# EAGLE board ares2015_motor_v0 (EAGLE 6.5.0)
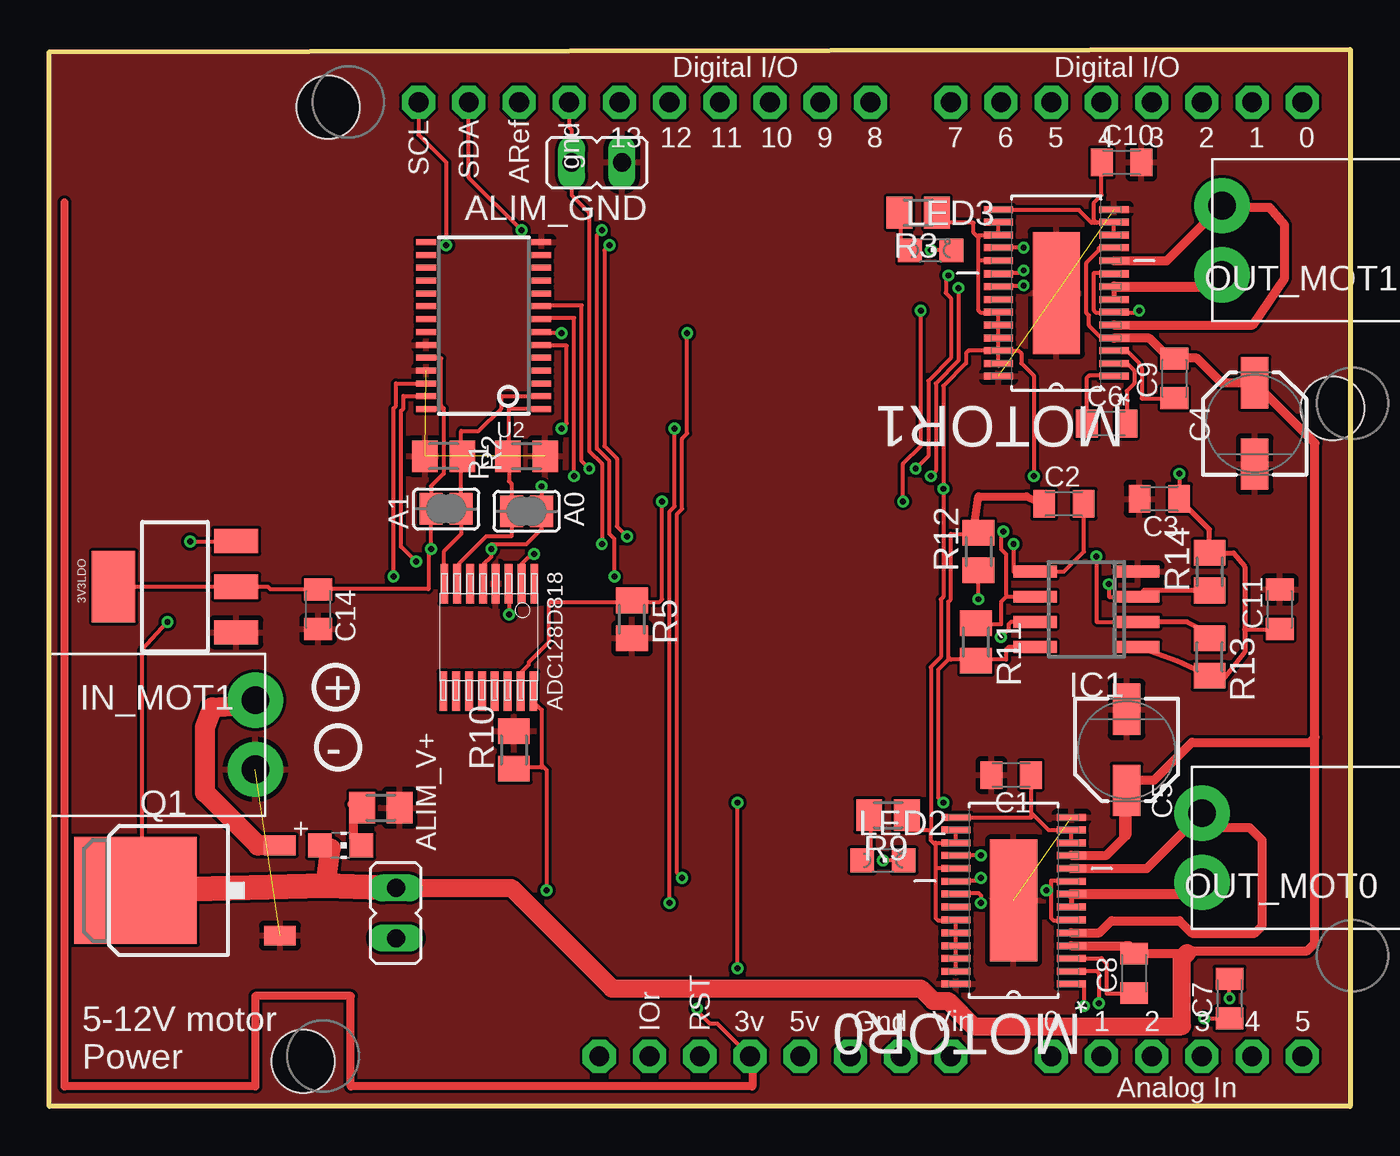
[diagram p0: board, top side]
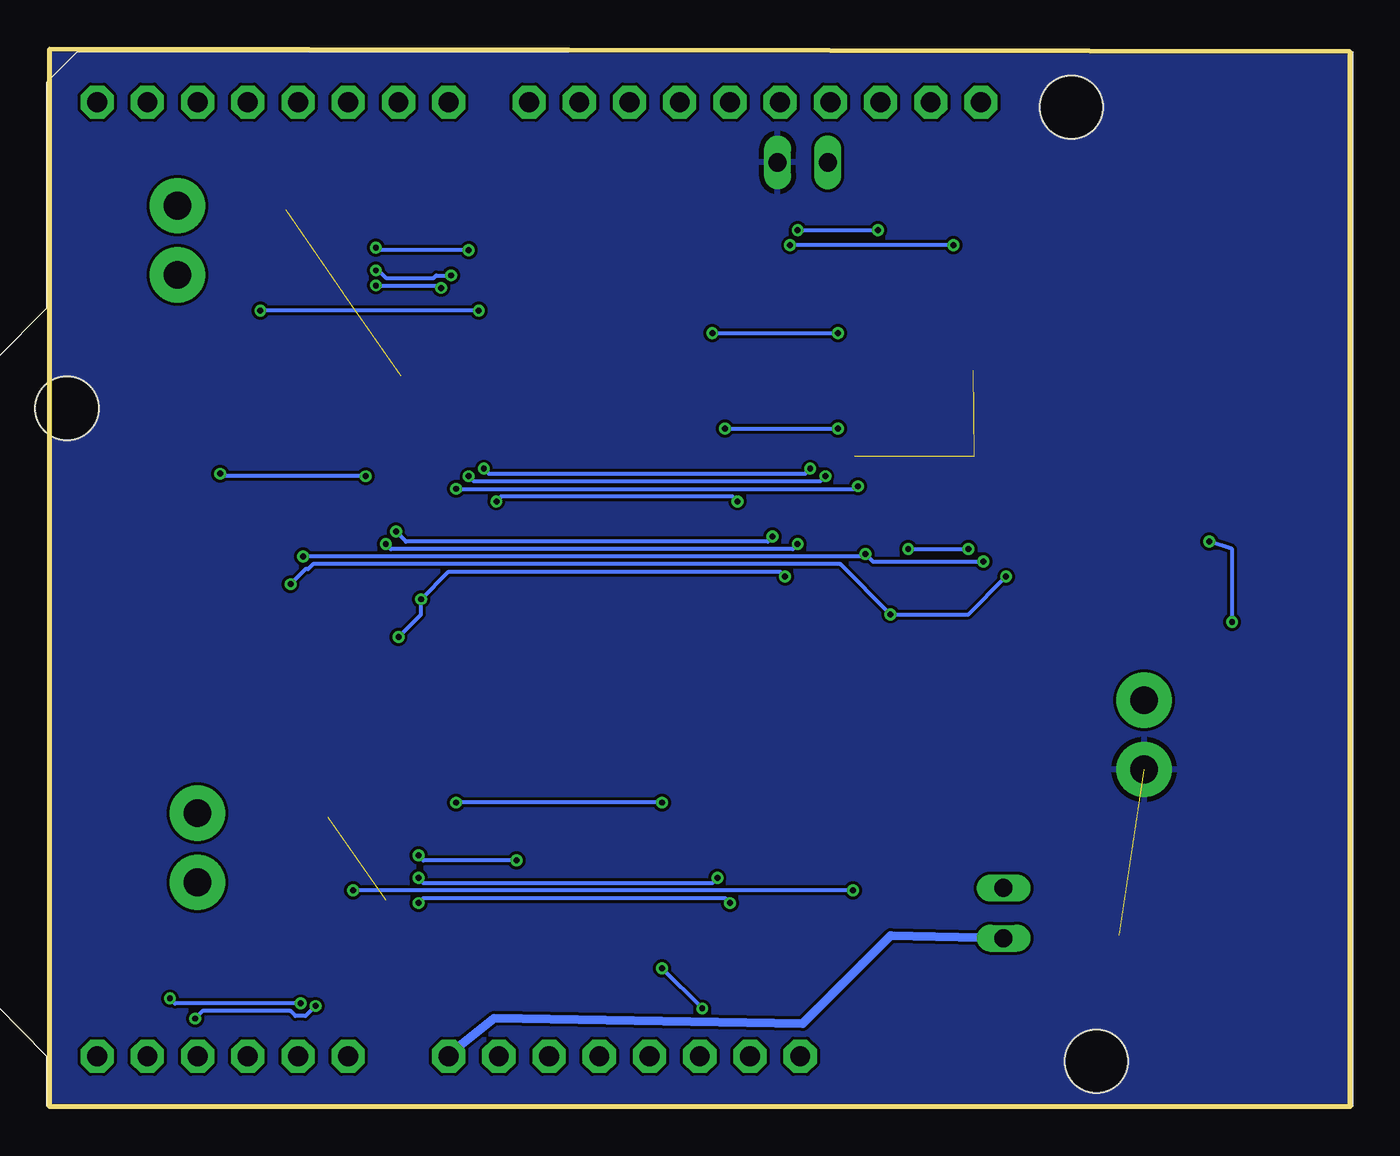
[diagram p1: board, bottom side, seen from below]

Size 65.79 x 53.47 mm. Coordinates in mm from the lower left corner, seen from the top.
Outline: 0,53.34 65.79,53.47 65.79,0 0,0 0,53.34
Copper layers (1*16): Top 0.035mm / dielectric 1.6mm / Bottom 0.035mm
Design rules "dipole": minimum track width 0.2mm, minimum drill 0.3mm, track to track 0.15mm, track to pad 0.15mm, pad to pad 0.15mm, via to via 0.15mm, smd to smd 0.01mm, copper to edge 0.01mm, drill to drill 0.01mm, minimum pad ring 0.15mm, minimum via ring 0.15mm, stop-mask expansion 1mil, vias tented up to drill 0mil, thermal gap 10mil
Holes 3.2 mm at 14.1,50.55 64.9,35.31 12.83,2.29

## Footprints (pad centres in the part's own frame; a part is rotated, then mirrored left to right if it is on the bottom)
SOT223 = smd 1.219 x 2.235: 1 -2.311,-3.099; 2 0,-3.099; 3 2.311,-3.099 | smd 3.6 x 2.2: 4 0,3.099
SJ = smd 1.168 x 1.6: 1 -0.762,0; 2 0.762,0
JP1 = drill 0.914 long: 1 0,-1.27; 2 0,1.27
C0805K = smd 1.1 x 1.4: 1 -1,0; 2 1,0
PANASONIC_C = smd 2.6 x 1.4: + 2.05,0; - -2.05,0
SO-08 = smd 0.6 x 2.2: 1 -1.905,-2.6; 2 -0.635,-2.6; 3 0.635,-2.6; 4 1.905,-2.6; 5 1.905,2.6; 6 0.635,2.6; 7 -0.635,2.6; 8 -1.905,2.6
SL-3.5-2-90G = drill 1.4 pad 2.8: 1 0,-1.75; 2 0,1.75
CHIP-LED0805 = smd 1.2 x 1.2: A 0,-1.05; C 0,1.05
CHIPLED_0805 = smd 1.2 x 1.2: A 0,-1.05; C 0,1.05
SOP65P640X120-29N = smd 1.473 x 0.356: 1 -2.921,4.216; 2 -2.921,3.581; 3 -2.921,2.921; 4 -2.921,2.286; 5 -2.921,1.626; 6 -2.921,0.965; 7 -2.921,0.33; 8 -2.921,-0.33; 9 -2.921,-0.965; 10 -2.921,-1.626; 11 -2.921,-2.286; 12 -2.921,-2.921; 13 -2.921,-3.581; 14 -2.921,-4.216; 15 2.921,-4.216; 16 2.921,-3.581; 17 2.921,-2.921; 18 2.921,-2.286; 19 2.921,-1.626; 20 2.921,-0.965; 21 2.921,-0.33; 22 2.921,0.33; 23 2.921,0.965; 24 2.921,1.626; 25 2.921,2.286; 26 2.921,2.921; 27 2.921,3.581; 28 2.921,4.216 | smd 2.388 x 6.172: 29 0,0
D-PAK_TO252AA = smd 1 x 1.6: 1 -2.28,-4.8; 3 2.28,-4.8 | smd 5.4 x 6.2: 4 0,2.5
M0805 = smd 1.3 x 1.6: 1 -0.95,0; 2 0.95,0
ARDUINOR3-BPLACE = drill 1 pad 1.676 octagon: 3V 35.56,2.54; 5V 38.1,2.54; A0 50.8,2.54; A1 53.34,2.54; A2 55.88,2.54; A3 58.42,2.54; A4 60.96,2.54; A5 63.5,2.54; AREF 23.876,50.8; D0 63.5,50.8; D1 60.96,50.8; D2 58.42,50.8; D3 55.88,50.8; D4 53.34,50.8; D5 50.8,50.8; D6 48.26,50.8; D7 45.72,50.8; D8 41.656,50.8; D9 39.116,50.8; D10 36.576,50.8; D11 34.036,50.8; D12 31.496,50.8; D13 28.956,50.8; GND 26.416,50.8; GND1 43.18,2.54; GND2 40.64,2.54; IOREF 30.48,2.54; RESERVED 27.94,2.54; RESET 33.02,2.54; SCL 18.796,50.8; SDA 21.336,50.8; VIN 45.72,2.54
TSSOP28 = smd 0.305 x 0.991: 1 -4.225,-2.918; 2 -3.575,-2.918; 3 -2.925,-2.918; 4 -2.275,-2.918; 5 -1.625,-2.918; 6 -0.975,-2.918; 7 -0.325,-2.918; 8 0.325,-2.918; 9 0.975,-2.918; 10 1.625,-2.918; 11 2.275,-2.918; 12 2.925,-2.918; 13 3.575,-2.918; 14 4.225,-2.918; 15 4.225,2.918; 16 3.575,2.918; 17 2.925,2.918; 18 2.275,2.918; 19 1.625,2.918; 20 0.975,2.918; 21 0.325,2.918; 22 -0.325,2.918; 23 -0.975,2.918; 24 -1.625,2.918; 25 -2.275,2.918; 26 -2.925,2.918; 27 -3.575,2.918; 28 -4.225,2.918
ADC128D818 = smd 0.4 x 2: 1 -2.3,-2.7; 2 -1.65,-2.7; 3 -1,-2.7; 4 -0.35,-2.7; 5 0.3,-2.7; 6 0.95,-2.7; 7 1.6,-2.7; 8 2.25,-2.7; 9 2.3,2.75; 10 1.65,2.75; 11 1,2.75; 12 0.35,2.75; 13 -0.3,2.75; 14 -0.95,2.75; 15 -1.6,2.75; 16 -2.25,2.75

## Placement (x,y rotation side)
3V3LDO  [SOT223]  6.35,26.29 90 top
A0  [SJ]  24.13,30.1 180 top
A1  [SJ]  20.07,30.23 0 top
ALIM_GND  [JP1]  27.69,47.75 90 top
ALIM_V+  [JP1]  17.53,9.78 180 top
C1  0.47uF  [C0805K]  48.64,16.76 180 top
C2  0.1uF  [C0805K]  51.31,30.48 0 top
C3  0.1uF  [C0805K]  56.13,30.73 180 top
C4  22uF/16v  [PANASONIC_C]  60.96,34.54 90 top
C5  22uF/16v  [PANASONIC_C]  54.48,18.03 270 top
C6  0.01uF  [C0805K]  53.47,34.54 0 top
C7  0.01uF  [C0805K]  59.69,5.46 90 top
C8  0.1uF  [C0805K]  54.86,6.73 90 top
C9  0.1uF  [C0805K]  56.9,36.83 90 top
C10  0.47uF  [C0805K]  54.23,47.75 0 top
C11  0.1uF  [C0805K]  62.23,25.15 90 top
C14  0.1uF  [C0805K]  13.59,25.15 270 top
IC1  ISO1541  [SO-08]  52.45,25.15 90 top
IN_MOT1  SL-3.5-2-90G  [SL-3.5-2-90G]  10.41,18.8 0 top
LED1  Green  [CHIP-LED0805]  14.73,13.21 270 top
LED2  rouge  [CHIPLED_0805]  42.16,12.45 270 top
LED3  rouge  [CHIPLED_0805]  44.58,43.31 270 top
MOTOR0  DRV8828PWP  [SOP65P640X120-29N]  48.77,10.41 180 top
MOTOR1  DRV8828PWP  [SOP65P640X120-29N]  50.93,41.15 180 top
OUT_MOT0  SL-3.5-2-90G  [SL-3.5-2-90G]  58.29,13.08 180 top
OUT_MOT1  SL-3.5-2-90G  [SL-3.5-2-90G]  59.31,43.82 180 top
Q1  AOD417  [D-PAK_TO252AA]  6.86,10.92 90 top
R1  10k  [M0805]  24.13,32.89 180 top
R2  10k  [M0805]  19.94,32.89 0 top
R3  330  [M0805]  43.94,45.21 180 top
R4  1K  [M0805]  16.76,15.11 180 top
R5  0.25  [M0805]  29.46,24.64 270 top
R9  330  [M0805]  42.42,14.73 180 top
R10  0.25  [M0805]  23.5,18.03 90 top
R11  1.5k  [M0805]  46.86,23.49 270 top
R12  1.5k  [M0805]  46.99,28.07 90 top
R13  1.5k  [M0805]  58.67,22.73 270 top
R14  1.5k  [M0805]  58.67,27.05 90 top
U1  ARDUINOR3-BPLACE  [ARDUINOR3-BPLACE]  -0.13,0 0 top
U2  PCA9685  [TSSOP28]  21.97,39.5 90 top
U$6  LMD128D818  [ADC128D818]  22.22,23.75 180 top

## Library data of the parts
3V3LDO = SparkFun-PowerIC; MF: NXP; MPN: ACT108W-600D; OC_FARNELL: 2074968
A0 A1 ALIM_GND ALIM_V+ = jumper; OC_FARNELL: unknown
C1 C10 = adafruit; MF: AVX; MPN: 04026D474KAT2A; OC_FARNELL: 1740587
C2 C3 C8 C9 C11 C14 = adafruit; MF: AVX; MPN: 02016D104KAT2A; OC_FARNELL: 1657913
C4 C5 U2 = microbuilder; OC_FARNELL: unknown
C6 C7 = adafruit; MF: AVX; MPN: 0201ZC103KAT2A; OC_FARNELL: 2280757
IC1 = texas; MF: TEXAS INSTRUMENTS; MPN: ISO7220AD; OC_FARNELL: 1390649; OC_NEWARK: 48M0666
IN_MOT1 OUT_MOT0 OUT_MOT1 = WEIDMULLER; MF: WEIDMULLER; MPN: SL 3.5/2/90G; OC_FARNELL: 1121786
LED1-LED3 R1-R5 R9-R14 = adafruit; OC_FARNELL: unknown
MOTOR0 MOTOR1 = Texas Instruments_By_element14_Batch_1; MPN: DRV8828PWP; OC_FARNELL: unknown; OC_NEWARK: 79R7959; PACKAGE: TSSOP-28; SUPPLIER: Texas Instruments
Q1 = transistor-power; OC_FARNELL: unknown
U1 = adafruit
U$6 = ADS128D818; OC_FARNELL: unknown

## Nets
+12V: 3V3LDO.3 ALIM_V+.1 C4.+ C5.+ C8.2 C9.2 LED1.A MOTOR0.4 MOTOR0.11 MOTOR1.4 MOTOR1.11 Q1.4
/RST: U1.RESET
A0: A0.2 R1.2 U2.1 U$6.7
A1: A1.2 R2.2 U2.2 U$6.8
A2: U2.3
A3: U2.4
A4: U2.5
ADC0: MOTOR0.6 MOTOR0.9 R10.1 U$6.16
ADC1: MOTOR1.6 MOTOR1.9 R5.1 U$6.15
ADC2: U$6.14
ADC3: U$6.13
ADC4: U$6.12
ADC5: U$6.11
ADC6: U$6.10
ADC7: U$6.9
GND: 3V3LDO.1 ALIM_GND.1 C1.2 C3.2 C4.- C5.- C10.2 C11.2 C14.2 IC1.4 IN_MOT1.1 MOTOR0.14 MOTOR0.28 MOTOR0.29 MOTOR1.14 MOTOR1.28 MOTOR1.29 Q1.1 R1.1 R2.1 R4.1 R5.2 R10.2 U2.14 U2.23 U2.25 U$6.4
GND1: U1.GND1
GND2: U1.GND2
GND_CLEAN: ALIM_GND.2 C2.2 IC1.5 U1.GND
N$1: U1.IOREF
N$2: U1.RESERVED
N$4: U1.D9
N$6: C6.1 MOTOR1.1
N$7: MOTOR0.7 MOTOR0.8 OUT_MOT0.2
N$9: U1.5V
N$12: C6.2 MOTOR1.2
N$14: C9.1 MOTOR1.3
N$15: U1.A5
N$16: MOTOR0.5 MOTOR0.10 OUT_MOT0.1
N$17: U1.A4
N$18: LED3.C MOTOR1.18
N$19: LED3.A R3.2
N$20: U1.A0
N$21: U1.A1
N$22: U1.A2
N$23: U1.A3
N$24: U1.D0
N$25: U1.D1
N$26: U1.D2
N$27: U1.D4
N$28: U1.D7
N$29: U1.D8
N$30: U1.D12
N$31: U1.D13
N$32: U1.AREF
N$33: MOTOR1.5 MOTOR1.10 OUT_MOT1.1
N$35: MOTOR1.7 MOTOR1.8 OUT_MOT1.2
N$36: C7.1 MOTOR0.1
N$37: C7.2 MOTOR0.2
N$39: C8.1 MOTOR0.3
N$44: LED2.A R9.2
N$45: LED2.C MOTOR0.18
N$133: LED1.C R4.2
N$140: IN_MOT1.2 Q1.3
PWM0: MOTOR0.21 U2.6
PWM0A: U1.D6
PWM0B: U1.D5
PWM1: MOTOR0.20 U2.7
PWM1B: U1.D10
PWM2: MOTOR1.21 U2.8
PWM2A: U1.D11
PWM2B: U1.D3
PWM3: MOTOR1.20 U2.9
PWM4: U2.10
PWM5: U2.11
PWM6: U2.12
PWM7: U2.13
PWM8: U2.15
PWM9: U2.16
PWM10: U2.17
PWM11: U2.18
PWM12: U2.19
PWM13: U2.20
PWM14: U2.21
PWM15: U2.22
SCL: IC1.3 R14.1 U2.26 U$6.3
SCL_CLEAN: IC1.6 R11.1 U1.SCL
SDA: IC1.2 R13.1 U2.27 U$6.2
SDA_CLEAN: IC1.7 R12.1 U1.SDA
V3POUT0: C1.1 MOTOR0.12 MOTOR0.13 MOTOR0.15
V3POUT1: C10.1 MOTOR1.12 MOTOR1.13 MOTOR1.15
VCC: 3V3LDO.2 3V3LDO.4 A0.1 A1.1 C3.1 C11.1 C14.1 IC1.1 MOTOR0.16 MOTOR0.17 MOTOR0.19 MOTOR0.23 MOTOR0.24 MOTOR0.25 MOTOR0.26 MOTOR0.27 MOTOR1.16 MOTOR1.17 MOTOR1.19 MOTOR1.23 MOTOR1.24 MOTOR1.25 MOTOR1.26 MOTOR1.27 R3.1 R9.1 R13.2 R14.2 U2.24 U2.28 U$6.5
VCC_CLEAN: C2.1 IC1.8 R11.2 R12.2 U1.3V
VIN_ARDUINO: ALIM_V+.2 U1.VIN

## Tracks (layer width: path | path; a pad name or v marks a point on that pad's centre or on a via)
+12V  (via drill 0.3)
  Top 0.2: MOTOR1.11 53.09,43.43 53.09,43.31 52.45,42.67 52.45,40.13 52.58,40.01 52.58,39.5 53.21,38.86 MOTOR1.4 | v7.11,28.57 9.4,28.57 3V3LDO.3 | v5.97,24.51 4.7,23.11 4.7,11.56 7.11,11.56 Q1.4
  Top 0.457: C5.+ 54.48,13.72 54.36,13.59 | C8.2 54.47,8.13 MOTOR0.4 54.61,8.13 54.99,7.75 57.53,7.75 57.66,7.75 57.78,7.87 63.63,7.87 64.01,8.26 64.01,18.67 | 64.01,18.67 64.01,33.55 C4.+ 59.29,36.59 58.04,37.85 56.91,37.85 C9.2 56.66,37.83 55.63,38.86 MOTOR1.4 | MOTOR0.11 53.47,12.7 54.36,13.59 | 54.36,13.59 54.36,16 54.86,16.51 55.88,16.51 57.78,18.41 63.75,18.41 64.01,18.67
  Top 0.914: ALIM_V+.1 23.37,11.05 28.45,5.97 44.07,5.97 44.7,5.33 45.47,5.33 46.74,4.06 57.28,4.06 57.28,7.49 57.53,7.75
  Top 1.016: LED1.A 14.22,13.05 13.97,11.18
  Top 1.27: Q1.4 13.97,11.18 ALIM_V+.1
  Bottom 0.2: v7.11,28.57 5.97,28.19 v5.97,24.51
A0
  Top 0.2: 23.24,32.89 23.24,35.31 24.77,35.31 U2.1 | 23.24,32.89 23.24,31.62 23.37,31.5 A0.2 23.37,28.83 22.1,28.83 20.7,27.43 20.7,26.54 U$6.7 | 23.24,32.89 R1.2
A1
  Top 0.2: 20.83,32.89 A1.2 20.83,28.96 19.94,28.07 19.94,26.54 U$6.8 | 20.83,32.89 20.83,34.16 21.72,34.16 22.86,35.31 22.86,35.94 24.77,35.94 U2.2 | 20.83,32.89 R2.2
ADC0  (via drill 0.3)
  Top 0.2: 50.67,10.92 50.67,9.53 50.8,9.4 51.69,9.4 MOTOR0.6 | 50.67,10.92 50.67,11.43 51.69,11.43 MOTOR0.9 | 24.89,17.27 24.89,20.07 24.51,20.45 24.51,20.95 U$6.16 | 24.89,17.27 24.89,17.14 23.5,17.14 R10.1 | v50.42,10.92 50.67,10.92 | v25.15,10.92 25.15,17.02 24.89,17.27
  Bottom 0.2: v25.15,10.92 v50.42,10.92
ADC1  (via drill 0.3)
  Top 0.2: 53.85,40.13 52.96,40.13 52.83,40.26 52.83,42.16 53.85,42.16 MOTOR1.9 | 29.46,25.53 25.27,25.53 25.27,23.49 24.26,22.48 24.26,22.35 23.88,21.97 23.88,21.08 U$6.15 | 53.85,40.13 55.12,40.13 v55.12,40.26 | v44.07,40.26 44.07,33.4 43.18,32.51 v43.18,30.61 | v30.99,30.61 30.99,25.65 30.86,25.53 29.46,25.53 | 53.85,40.13 MOTOR1.6 | 29.46,25.53 R5.1
  Bottom 0.2: v44.07,40.26 v55.12,40.26 | v43.18,30.61 42.93,30.86 31.24,30.86 v30.99,30.61
GND  (6 unrouted)
  pour Bottom: -7.24,-9.14 -4.19,58.8 75.18,56.64 78.49,-7.37
  pour Top: -6.48,-4.45 -5.33,57.02 76.96,58.04 76.96,-4.57
GND_CLEAN  (via drill 0.3)
  Top 0.2: C2.2 52.32,30.48 52.32,28.07 51.31,27.05 IC1.5 48.77,27.05 v48.77,28.45 | U1.GND 26.29,49.53 26.42,49.4 ALIM_GND.2 26.42,46.1 27.3,45.21 27.3,33.15 27.94,32.51 v27.94,28.45
  Bottom 0.2: v48.77,28.45 48.51,28.19 28.19,28.19 v27.94,28.45
N$6
  Top 0.2: C6.1 52.45,34.54 52.45,36.83 52.58,36.96 53.85,36.96 MOTOR1.1
N$7
  Top 0.254: MOTOR0.8 MOTOR0.7 | 57.58,10.74 OUT_MOT0.2
  Top 0.508: MOTOR0.8 57.58,10.74
N$12
  Top 0.2: C6.2 54.48,34.54 54.48,36.2 54.86,36.58 54.86,37.21 54.48,37.59 53.85,37.59 MOTOR1.2
N$14
  Top 0.2: MOTOR1.3 54.48,38.23 55.12,37.59 55.12,37.47 55.24,37.34 55.24,35.81 56.9,35.81 C9.1
N$16
  Top 0.457: MOTOR0.10 55.5,12.04 OUT_MOT0.1 59.03,14.1 60.71,14.1 61.34,13.46 61.34,9.14 60.96,8.76 57.78,8.76 57.15,9.4 53.72,9.4 53.11,8.79 MOTOR0.5
N$18  (via drill 0.3)
  Top 0.2: v49.28,43.43 MOTOR1.18 | LED3.C v44.58,43.31
  Bottom 0.2: v49.28,43.43 49.15,43.31 v44.58,43.31
N$19
  Top 0.2: LED3.A 43.05,43.31 43.05,45.21 R3.2
N$33
  Top 0.457: MOTOR1.5 60.86,39.52 62.48,41.91 62.48,44.58 61.72,45.47 59.28,45.47 OUT_MOT1.1 56.52,42.77 MOTOR1.10
N$35
  Top 0.254: 58.72,41.48 OUT_MOT1.2 | MOTOR1.8 MOTOR1.7
  Top 0.508: MOTOR1.8 58.72,41.48
N$36  (via drill 0.3)
  Top 0.2: v58.42,4.45 C7.1 | v52.32,5.08 52.32,6.1 52.2,6.22 51.69,6.22 MOTOR0.1
  Bottom 0.2: v58.42,4.45 58.04,4.83 53.59,4.83 53.34,4.57 52.83,4.57 v52.32,5.08
N$37  (via drill 0.3)
  Top 0.2: v59.69,5.46 C7.2 | v53.09,5.21 53.09,6.73 52.96,6.86 51.69,6.86 MOTOR0.2
  Bottom 0.2: v59.69,5.46 59.44,5.21 v53.09,5.21
N$39
  Top 0.2: MOTOR0.3 53.21,7.49 53.47,7.24 53.47,5.71 54.86,5.71 C8.1
N$44
  Top 0.2: LED2.A 41.53,12.45 41.53,14.73 R9.2
N$45  (via drill 0.3)
  Top 0.2: v47.12,12.7 MOTOR0.18 | LED2.C v42.16,12.45
  Bottom 0.2: v47.12,12.7 46.86,12.45 v42.16,12.45
N$133
  Top 0.457: R4.2 15.31,15.3 15.37,15.24 15.37,13.62 LED1.C
N$140
  Top 1.016: Q1.3 10.55,13.2 7.87,15.88 7.87,19.18 8.25,20.19 9.93,20.32 IN_MOT1.2
PWM0  (via drill 0.3)
  Top 0.2: v25.91,34.29 26.16,34.54 26.16,38.48 24.89,38.48 U2.6 | v31.62,34.29 31.62,30.35 31.37,30.1 v31.37,10.29 | v47.12,10.29 47.12,10.67 46.99,10.79 45.85,10.79 MOTOR0.21
  Bottom 0.2: v31.62,34.29 v25.91,34.29 | v31.37,10.29 31.62,10.54 46.86,10.54 v47.12,10.29
PWM1  (via drill 0.3)
  Top 0.2: v25.91,39.12 24.89,39.12 U2.7 | v32.26,39.12 32.26,34.04 32,33.78 32,30.23 31.75,29.97 31.75,11.81 v32,11.56 | v47.12,11.56 46.99,11.43 45.85,11.43 MOTOR0.20
  Bottom 0.2: v32.26,39.12 v25.91,39.12 | v32,11.56 32.26,11.3 46.86,11.3 v47.12,11.56
PWM2  (via drill 0.3)
  Top 0.2: v26.54,31.88 26.54,39.88 24.89,39.88 U2.8 | v44.58,31.88 44.83,32.13 44.83,36.58 45.97,37.72 v45.97,41.4 | v49.28,41.53 48.01,41.53 MOTOR1.21
  Bottom 0.2: v26.54,31.88 26.8,31.62 44.32,31.62 v44.58,31.88 | v45.97,41.4 46.1,41.53 v49.28,41.53
PWM3  (via drill 0.3)
  Top 0.2: v27.3,32.26 26.92,32.64 26.92,40.51 24.89,40.51 U2.9 | v43.81,32.26 44.45,32.89 44.45,36.7 45.59,37.85 45.59,40.89 45.34,41.15 45.34,41.91 v45.47,42.04 | v49.28,42.29 49.15,42.16 48.01,42.16 MOTOR1.20
  Bottom 0.2: v27.3,32.26 27.56,32 43.56,32 v43.81,32.26 | v45.47,42.04 46.23,42.04 46.35,41.91 48.77,41.91 49.15,42.29 v49.28,42.29
SCL  (via drill 0.3)
  Top 0.2: v17.4,26.8 17.4,35.31 17.53,35.43 17.53,36.58 U2.26 | v23.24,24.89 23.24,26.42 U$6.3 | IC1.3 53.59,25.78 v53.59,26.42
  Top 0.254: R14.1 55.37,26.1 IC1.3
  Bottom 0.2: v17.4,26.8 19.3,24.89 v23.24,24.89 25.78,27.43 52.45,27.43 52.7,27.18 52.83,27.18 v53.59,26.42
SCL_CLEAN  (via drill 0.3)
  Top 0.2: 48.39,25.78 48.13,25.53 48.13,24.38 46.86,24.38 R11.1 | IC1.6 48.39,25.78 | 48.39,25.78 48.39,27.94 48.13,28.19 48.13,28.96 v48.26,29.08 | v29.21,28.83 28.7,29.34 28.7,32.77 28.07,33.4 28.07,43.31 v28.32,43.56 | v20.07,43.56 20.07,47.75 18.67,49.15 U1.SCL
  Bottom 0.2: v48.26,29.08 47.75,28.57 29.46,28.57 v29.21,28.83 | v20.07,43.56 v28.32,43.56
SDA  (via drill 0.3)
  Top 0.2: v18.54,27.56 17.78,28.32 17.78,35.18 17.91,35.31 17.91,35.94 19.05,35.94 U2.27 | v24.51,27.94 24.38,27.94 23.88,27.43 23.88,26.54 U$6.2 | IC1.2 52.96,24.51 v52.96,27.81
  Top 0.254: R13.1 58.61,23.94 57.53,24.51 IC1.2
  Bottom 0.2: v18.54,27.56 24.13,27.56 v24.51,27.94 24.51,27.81 v52.96,27.81
SDA_CLEAN  (via drill 0.3)
  Top 0.2: v46.99,25.65 R12.1 | v48.13,23.75 48.51,24.13 48.51,24.38 48.64,24.51 IC1.7 | U1.SDA 21.21,46.99 v23.88,44.32 | v27.94,44.32 27.69,44.07 27.69,33.27 28.32,32.64 28.32,28.96 28.57,28.7 v28.57,26.8
  Bottom 0.2: v48.13,23.75 46.99,24.89 v46.99,25.65 45.59,27.05 28.83,27.05 v28.57,26.8 | v27.94,44.32 v23.88,44.32
V3POUT0
  Top 0.2: MOTOR0.12 51.69,13.97 | 49.72,14.8 50.55,13.97 51.69,13.97 | 49.72,14.8 49.66,14.86 49.66,16.76 C1.1 | 51.69,13.97 MOTOR0.13 | MOTOR0.15 45.85,14.61 49.66,14.61 49.66,14.73 49.72,14.8
V3POUT1
  Top 0.2: MOTOR1.12 53.85,44.7 | 52.89,44.77 52.96,44.7 53.85,44.7 | 52.89,44.77 52.83,44.83 52.83,45.72 53.21,46.1 53.21,47.75 C10.1 | 53.85,44.7 MOTOR1.13 | MOTOR1.15 48.01,45.34 52.07,45.34 52.7,44.7 52.83,44.7 52.89,44.77
VCC  (via drill 0.3)
  Top 0.2: 13.59,26.16 11.18,26.16 11.05,26.29 3V3LDO.2 3.43,26.29 3.3,26.42 3.17,26.29 3V3LDO.4 | 19.81,35.43 19.81,35.31 19.18,35.31 U2.28 | 19.81,35.43 19.81,37.85 19.18,37.85 U2.24 | 19.81,35.43 19.94,35.31 19.94,32 19.3,31.37 A1.1 v19.3,28.19 19.18,28.07 19.18,26.16 13.59,26.16 | U$6.5 21.97,26.54 21.97,27.43 22.35,27.81 v22.35,28.19 22.35,28.45 24.13,28.45 24.89,29.21 A0.1 v24.89,31.37 | 13.59,26.16 C14.1 | 45.85,7.37 45.85,6.98 45.72,6.86 45.85,6.73 MOTOR0.27 | 45.85,8 45.85,7.62 45.72,7.49 45.85,7.37 | 45.85,7.37 MOTOR0.26 | 45.85,8 45.72,8.13 45.85,8.26 MOTOR0.24 45.85,9.4 | 45.85,8 MOTOR0.25 | 44.83,12.07 45.85,12.07 MOTOR0.19 | 44.83,12.07 44.83,9.53 44.96,9.4 45.85,9.4 | 45.85,9.4 MOTOR0.23 | 44.83,12.07 44.83,13.21 | 44.83,13.21 44.83,13.34 MOTOR0.17 MOTOR0.16 | 44.58,13.97 43.43,13.97 43.31,14.1 43.31,14.73 R9.1 | 44.58,13.97 44.58,13.46 44.83,13.21 | 60.45,24.13 62.23,24.13 C11.1 | 48.01,38.1 48.01,37.72 47.88,37.59 48.01,37.47 MOTOR1.27 | 48.01,38.73 48.01,38.35 47.88,38.23 | 48.01,38.1 47.88,38.23 | 48.01,38.1 MOTOR1.26 | 48.01,38.73 47.88,38.86 48.01,38.99 MOTOR1.24 48.01,40.13 | 48.01,38.73 MOTOR1.25 | 46.99,42.8 48.01,42.8 MOTOR1.19 | 46.99,42.8 46.99,40.26 47.12,40.13 48.01,40.13 | 48.01,40.13 MOTOR1.23 | 46.99,42.8 46.99,43.94 | 46.99,43.94 46.99,44.07 MOTOR1.17 MOTOR1.16 | 46.99,43.94 46.74,44.2 46.74,44.7 45.47,44.7 44.96,45.21 R3.1 | v57.15,32 57.15,30.73 C3.1 | v49.78,31.88 49.78,36.96 49.15,37.59 49.15,38.1 49.02,38.23 MOTOR1.26 | 44.58,13.97 44.58,22.22 45.09,22.73 45.09,25.65 45.21,25.78 v45.21,31.24 45.21,36.45 46.35,37.59 46.35,38.1 46.48,38.23 47.88,38.23
  Top 0.2: 47.88,38.23 MOTOR1.26
  Top 0.254: IC1.1 57.02,22.54 R13.2 59.12,21.34 59.18,21.34 60.45,22.99 60.45,24.13 60.45,27.3 59.88,28 R14.2 58.67,29.19 C3.1
  Bottom 0.2: v22.35,28.19 v19.3,28.19 | v57.15,32 57.02,31.88 v49.78,31.88 | v24.89,31.37 25.02,31.24 v45.21,31.24
VCC_CLEAN  (via drill 0.3)
  Top 0.2: 46.86,22.61 48.39,22.61 48.39,23.11 48.51,23.24 IC1.8 | 45.53,22.67 45.59,22.61 46.86,22.61 | 45.53,22.67 45.47,22.73 45.47,25.53 45.59,25.65 45.59,28.96 46.61,28.96 R12.2 | 46.86,22.61 R11.2 | 45.53,22.67 44.96,22.1 44.96,15.62 v45.21,15.37 | v34.8,6.98 v34.8,15.37 | v32.77,4.95 32.77,4.83 33.4,4.19 33.78,4.19 34.92,3.05 35.43,3.05 U1.3V
  Top 0.406: U1.3V 35.56,2.54 35.56,1.02 15.24,1.02 15.24,5.59 10.41,5.59 10.41,1.02 0.76,1.02 0.76,45.72 | R12.2 46.74,29.08 46.99,30.86 49.42,30.86 C2.1
  Bottom 0.2: v34.8,15.37 v45.21,15.37 | v32.77,4.95 v34.8,6.98
VIN_ARDUINO
  Bottom 0.457: ALIM_V+.2 23.24,8.64 27.69,4.19 43.31,4.45 45.21,2.92 U1.VIN

## Text on the board
tPlace: + | - | 5-12V motor | Power
_tNames: R12 | C10 | R11 | C5 | LED3 | C2 | R3 | OUT_MOT1 | IC1 | C3 | R14 | C6 | C9 | R13 | R10 | R5 | C4 | C11 | 3V3LDO | C14 | C1 | LED2 | R9 | ALIM_V+ | OUT_MOT0 | Q1 | R2 | R1 | ALIM_GND | C8 | A1 | C7 | MOTOR0 | A0 | IN_MOT1